# Altium PCB LoraSMS.PcbDoc (part 2 of 2)
Units mil, origin at the board's own origin, x right, y up, seen from the top; angles counter-clockwise.
Board outline 2825 x 4480 mil, 2 copper layers (Top Layer, Bottom Layer), stack 60.8 mil thick; 87 components, 73 nets, 342 pads, 470 vias.
Unrouted connection lines stored in the file: 3.
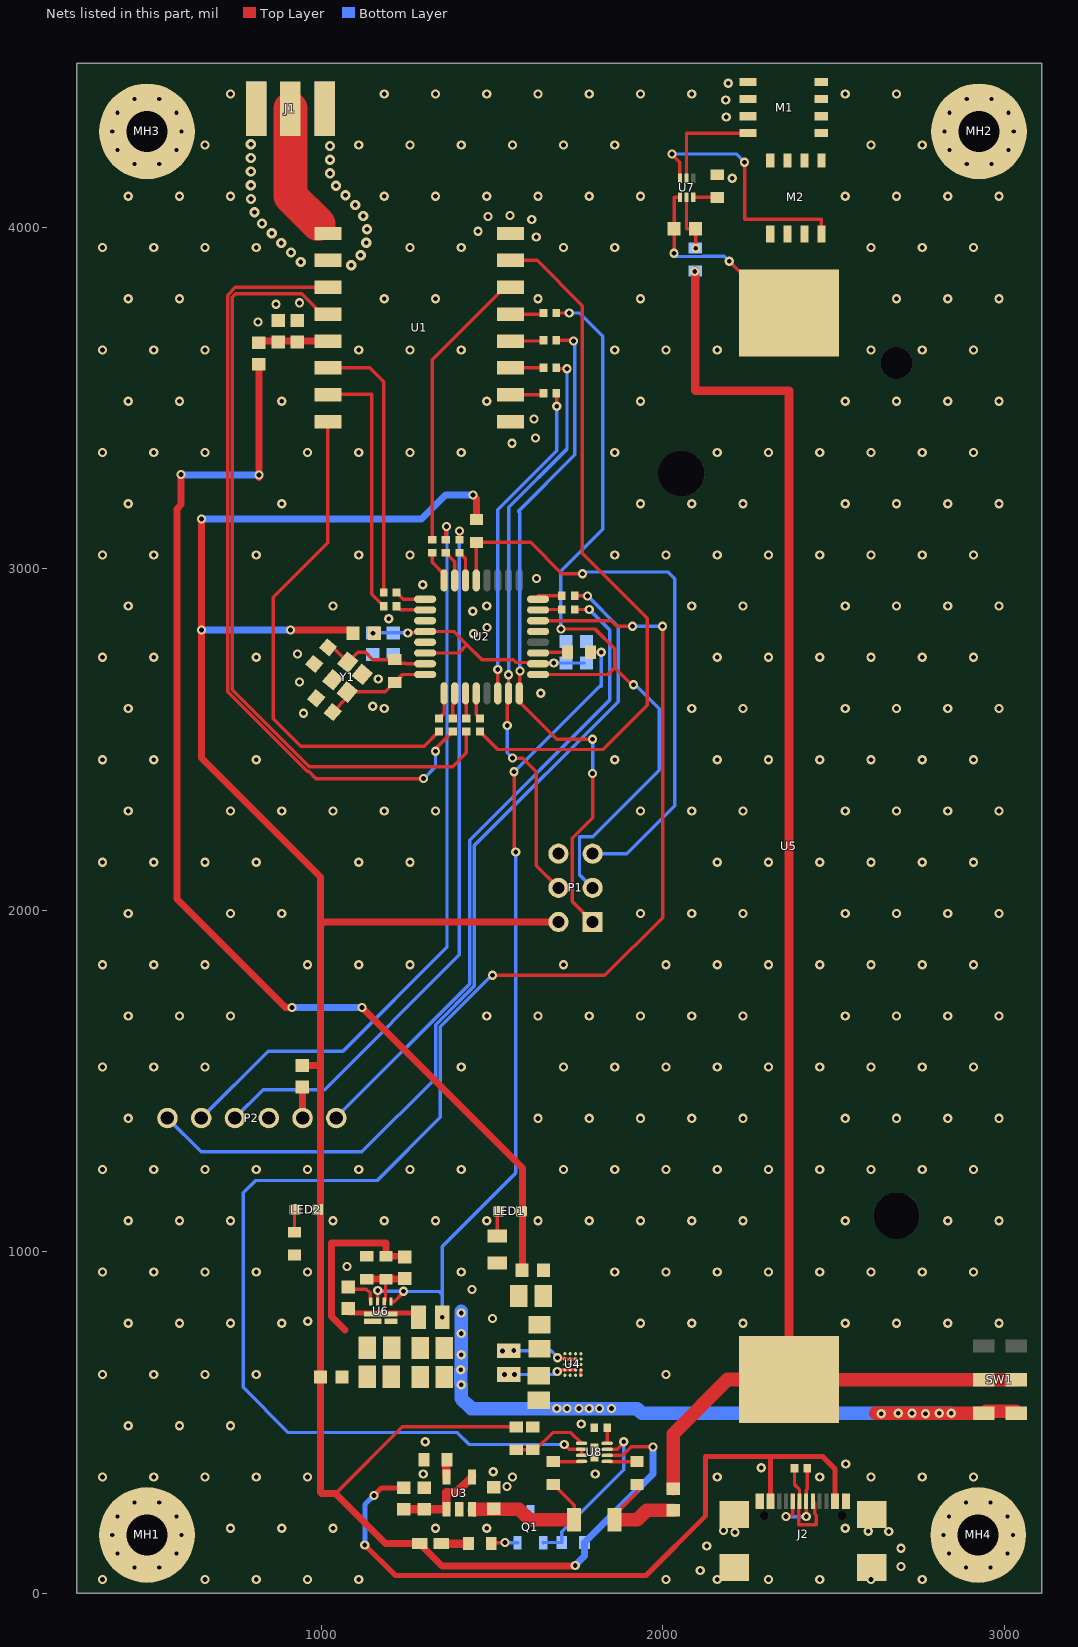
[diagram p2: the nets of this part, all layers, seen from the top]

## Part data
C1 C3 C4 C5: library part 060-00124-000, "CAP, CER, SMT, 25V, +/- 10%, X7R, 0603", DIELECTRIC=X7R, Manufacturer="Kemet Corporation", Manufacturer P/N=C0603C104K3RAC, Package=C0603, TOLERANCE=10%, Value (nF)=100, Value (pF)=100000, Value (µF)=0.1, VOLTAGE=25V, Avidyne P/N=060-00124-000, Cost=0.0043
C2 C3 C8 C9: library part 060-00192-001, "CAP, CER, SMT, 1.0UF, 25V, 10%, X5R, 0603", DIELECTRIC=X5R, Manufacturer="Kemet Corporation", Manufacturer P/N=C0603C105K3PAC, Package=C0603, TOLERANCE=10%, Value (nF)=1000, Value (pF)=1000000, Value (µF)=1, VOLTAGE=25V, Avidyne P/N=060-00192-001, Cost=0.0145
C6 C7: library part 060-00139-005, "CAP, CER, 10%, 50V, 27PF, CAP0603", DIELECTRIC=NP0, Manufacturer="Kemet Corporation", Manufacturer P/N=C0603C270K5GAC, Package=C0603, TOLERANCE=10%, Value (nF)=0.027, Value (pF)=27, Value (µF)=0.000027, VOLTAGE=50V, Avidyne P/N=060-00139-005, Cost=0.01
C10 C11 C17 C18: library part 060-00196-000, "CAP, CER, 10UF, 16V, X5R, 0805", DIELECTRIC=X5R, Manufacturer="Murata Manufacturing Co., Ltd.", Manufacturer P/N=GRM21BR61C106KE15L, Package=C0805, TOLERANCE=10%, Value (nF)=10000, Value (pF)=10000000, Value (µF)=10, VOLTAGE=16V, Avidyne P/N=060-00196-000, Cost=0.0373
C12: library part 060-00269-000, "CAP, CER, 0805, 20%, 6.3V, X5R, 47UF", DIELECTRIC=X5R, Manufacturer="Kemet Corporation", Manufacturer P/N=C0805C476M9PACTU, Package=C0805, TOLERANCE=20%, Value (nF)=47000, Value (pF)=47000000, Value (µF)=47, VOLTAGE=6.3V, Avidyne P/N=060-00269-000, Cost=0.164
C13: library part 060-00243-000, "CAP, CER, 5%, 25V, C0G, 0603, 10,000PF", DIELECTRIC=NP0, Manufacturer="TDK Corporation", Manufacturer P/N=C1608C0G1E103JT, Package=C0603, TOLERANCE=5%, Value (nF)=10, Value (pF)=10000, Value (µF)=0.01, VOLTAGE=25V, Avidyne P/N=060-00243-000, Cost=0.2528
C14 C15: library part 060-00268-000, "CAP, CER, 0805, 20%, 10V, X7R, 22UF", DIELECTRIC=X7R, Manufacturer="Taiyo Yuden USA, Inc.", Manufacturer P/N=LMK212BJ226MG-T, Package=C0805, TOLERANCE=20%, Value (nF)=22000, Value (pF)=22000000, Value (µF)=22, VOLTAGE=10V, Avidyne P/N=060-00268-000, Cost=0.134
C16: library part 064-00028-016, "CAP RF, HIQ, NPO, +/-1%, 10GHZ, 200, 100V, 0603, 10PF, ROHS", DIELECTRIC=NP0, Manufacturer=Vishay, Manufacturer P/N=VJ0603D100FXBA, Package=C0603, TOLERANCE=1%, Value (nF)=0.01, Value (pF)=10, Value (µF)=0.00001, VOLTAGE=100V, Avidyne P/N=064-00028-016, Cost=0.18353
C19: library part 060-00041-000, "CAP, CER, SMT, 25V, +80/-20%,Y5V,0603,.1uf", DIELECTRIC=Y5V, Manufacturer="Kemet Corporation", Manufacturer P/N=C0603C104M3VAC, Package=C0603, TOLERANCE=20%, Value (nF)=100, Value (pF)=100000, Value (µF)=0.1, VOLTAGE=25V, Avidyne P/N=060-00041-000
D1: library part 023-00316-000, "DIODE, LED, RED, SMT, 2.5V, 0603", Current=20mA, LED_COLOR=RED, Manufacturer=Kingbright, Package=D0603, VOLTAGE=2.5V, Avidyne P/N=023-00316-000, Candela=100mcd, Cost=0.04, Manufacturer P/N=APT1608SRCPRV, Type=LED, Vf=1.85V, Wattage=75mW, Wavelength=640nm
FB1 FB2 FB3 FB4 FB5 FB6 FB7: library part 082-00014-004, "FERRITE,100MHZ,0603,25%,120OHM ROHS", Current=2A, Manufacturer=Murata, Package=L0603, Avidyne P/N=082-00014-004, Cost=0.0172, DCR="50 mOhm", Impedance="120 Ohm @ 100MHz", Manufacturer P/N=BLM18PG121SN1D
J1: library part 030-00761-000, "CONN, SMA JACK, FEMALE, EDGE", Manufacturer=LINX, Package=SMA, Avidyne P/N=030-00761-000, Cost=3.37, Manufacturer P/N=CONSMA003.062
J2: library part USB4110-GF-A, "CONN USB 2.0 TYPE-C R/A SMT", Manufacturer=GCT, Avidyne P/N=030-00779-000, Contacts=24, Cost=1.37, Manufacturer P/N=USB4110-GF-A, Type=Female
L1 L2: library part 080-00223-000, "INDUCTOR POWER 1UH 1.5A SMD", Current=3.1A, Current_Sat=3.5A, Manufacturer="Vishay Dale", Manufacturer P/N=IHHP0806AZER1R0M01, Package="0.079\" L x 0.063\" W", TOLERANCE=20%, Avidyne P/N=080-00223-000, Cost=0.13, DCR="65 mOhm"
LED1 LED2: library part LED_SMD_Green_0603_570nm, "LED 0603 SMD Green 570nm 50mcd 20mA", Current - Test=20mA, Manufacturer 1="Kingbright Company LLC", Manufacturer Part Number 1=APT1608CGCK, Package / Case="0603 (1608 metric)", Ratings="20mcd min; 50 mcd typ; 570 nm", Supplier Part Number 1=754-1116-1-ND, Voltage - Forward (Vf) @ 10mA=2.0V, Voltage - Forward (Vf) Typ=2.1V, Color=Green, ComponentLink1Description=http://www.us.kingbright.com/images/catalog/SPEC/APT1608CGCK.pdf, ComponentLink1URL=http://www.us.kingbright.com/images/catalog/SPEC/APT1608CGCK.pdf, Lens Style/Size="Rectangle with Flat Top, 1.1mm x 0.8mm", Lens Type=Clear, Material=AlGaInP, RoHS 1="RoHS Compliant", SCDType=source, Supplier 1=Digi-Key, Viewing Angle=120°, Wavelength - Dominant=570nm, Wavelength - Peak=574nm
M1 M2: library part FDMS7692, "MOSFET N-CH 30V 14A POWER56", Manufacturer="ON Semiconductor", Cost=0.62, Id=14A, Manufacturer P/N=FDMS7692, Qg="22nC @ 10V", Rds(on)="7.5 Ohm", Type=NMOS, Vdss=30V, Vgs(th)="3V @ 250UA", Wattage=2.5w
MH1 MH2 MH3 MH4: library part MHOLE-120-280, "Mounting Hole"
P1: "Header, 3-Pin, Dual row", LatestRevisionDate=17-Jul-2002, LatestRevisionNote="Re-released for DXP Platform.", Publisher="Altium Limited"
P2: "HC-05 BLUETOOTH MODULE"
Q1: library part 025-00001-000, "TRANS,BJT,PNP,3906,SOT-23", Current=200mA, Manufacturer="Fairchild Semiconductor", Package=SOT-23, VOLTAGE=40V, Avidyne P/N=025-00001-000, Cost=0.012, Gain="100 @ 10mA", Manufacturer P/N=MMBT3906, Type=PNP, Wattage=350mW
R1 R24: library part 070-00486-037, "RES, THICK FILM CHIP, SMT, 1/10W, 1%, 0603, 100K OHM", Manufacturer="Panasonic Electronic Devices, Corp.", Manufacturer P/N=ERJ3EKF1003V, Package=R0603, TOLERANCE=1%, Avidyne P/N=070-00486-037, Cost=0.0016, Wattage=1/10W
R2 R3 R5 R6 R7 R8 R9 R10 R11 R12 R13 R14 R15 R16 R17 R27 R32: library part 070-00475-085_SHORT, "RES, THICK FILM CHIP, 1/16W, 1%, RES0402, 0 OHM, ROHS, SHORT-IN-PAD!", Manufacturer="Vishay-Dale Intertechnology, Inc", Manufacturer P/N=CRCW04020000Z0ED, Package=R0402, TOLERANCE=1%, Avidyne P/N=070-00475-085, Cost=0.0012, Do Not Populate=DNP, Wattage=1/16W
R4 R29: library part 070-00470-014, "RES, THICK FILM CHIP, SMT, 1/10W, 5%, 0603, 10K OHM", Manufacturer="Vishay-Dale Intertechnology, Inc", Manufacturer P/N=CRCW060310K0JNEA, Package=R0603, TOLERANCE=5%, Avidyne P/N=070-00470-014, Wattage=1/10W
R18: library part 070-00305-000, "RES, 1/10W, 5%, 0603, I MEG", Manufacturer="KOA-Speer Electronics, Inc.", Manufacturer P/N=RM73B1JT105J, Package=R0603, TOLERANCE=5%, Avidyne P/N=070-00305-000, Wattage=1/10W
R19: library part 070-00072-000, "RES, 1/8W, 5%, 0805, 330 OHM", Manufacturer="KOA-Speer Electronics, Inc.", Manufacturer P/N=RM73B2AT331J, Package=R0805, TOLERANCE=5%, Avidyne P/N=070-00072-000, Cost=0.0019, Wattage=1/8W
R20 R25: library part 070-00470-011, "RES, THICK FILM CHIP, SMT, 1/10W, 5%, 0603, 510 OHM", Manufacturer="Panasonic Electronic Devices, Corp.", Manufacturer P/N=ERJ3GEYJ511V, Package=R0603, TOLERANCE=5%, Avidyne P/N=070-00470-011, Wattage=1/10W
R21: library part 070-00442-000, "RES, 1/16 W, 1%, 0603, 330 OHM", Manufacturer="Panasonic Electronic Devices, Corp.", Manufacturer P/N=ERJ-3ENF3300V, Package=R0603, TOLERANCE=1%, Avidyne P/N=070-00442-000, Wattage=1/10W
R22: library part 070-00486-071, "RES, THICK FILM CHIP, SMT, 1/10W, 1%, 0603, 316K OHM", Manufacturer="Panasonic Electronic Devices, Corp.", Manufacturer P/N=ERJ3EKF3163V, Package=R0603, TOLERANCE=1%, Avidyne P/N=070-00486-071, Cost=0.0016, Wattage=1/10W
R23: library part 070-00208-000, "RES, 1/10W, 5%, 0603, 2.2K OHM", Manufacturer="KOA-Speer Electronics, Inc.", Manufacturer P/N=RM73B1JT222J, Package=R0603, TOLERANCE=5%, Avidyne P/N=070-00208-000, Cost=0.0012, Wattage=1/10W
R26: library part 070-00415-000, "RES, 1/16W, 1%, 0603, 2.00K OHM", Manufacturer="Panasonic Electronic Devices, Corp.", Manufacturer P/N=ERJ-3EKF2001V, Package=R0603, TOLERANCE=1%, Avidyne P/N=070-00415-000, Cost=0.0032, Wattage=1/16W
R28 R31: library part 070-00486-069, "RES, THICK FILM CHIP, SMT, 1/10W, 1%, 0603, 5.1 OHM", Manufacturer="Panasonic Electronic Devices, Corp.", Manufacturer P/N=ERJ-3EKF5R1V, Package=R0603, TOLERANCE=1%, Avidyne P/N=070-00486-069, Wattage=1/10W
R30: library part 070-00499-001, "RES, THICK FILM, CURRENT SENSE, 1/2 W, 1%, RES1206, 0.05 OHMS", Manufacturer="TT Electronics, PLC", Manufacturer P/N=LRC-LR1206LF-01-R050-F, Package=R1206, TOLERANCE=1%, Avidyne P/N=070-00499-001, Cost=0.155, Wattage=1/2W
R33: library part 070-00113-000, "RES,1/10W,1%,0603,100K OHM", Manufacturer="Panasonic Electronic Devices, Corp.", Manufacturer P/N=ERJ-3EKF1003V, Package=R0603, TOLERANCE=1%, Avidyne P/N=070-00113-000, Cost=0.002, Wattage=1/10W
R34: library part 070-00597-000, "RES, METAL FILM, 1/16W, .5%, 0603, SMD, 4.02K", Manufacturer=Susumu, Manufacturer P/N=RR0816P-4021-D-59H, Package=R0603, TOLERANCE=1%, Avidyne P/N=070-00597-000, Cost=0.01178, Wattage=1/16W
SW1: library part JS202011JAQN, "SWITCH SLIDE DPDT 300MA 6V", Manufacturer P/N=C&K, Cost=0.51, Manufacturer=JS202011JAQN
U1: library part "LoRa Module", "RFM69HCW WIRELESS TRANSCEIVER 91", Current=130mA, Manufacturer=SparkFun, Manufacturer P/N=COM-13909, Package=Module, Voltage-Input="1.8V ~ 3.6V", Avidyne P/N=011-XXXXX-XXX, Cost=5.95
U2: "8-bit AVR Microcontroller, 32KB Flash, 1KB EEPROM, 2KB SRAM, 32-pin TQFP, Industrial Grade (-40°C to 85°C)", Supplier Part Number 1=ATMEGA328P-AUR-ND, Code_JEDEC=MS-026-ABA, ComponentLink1Description="Manufacturer Link", ComponentLink1URL=http://www.atmel.com/products/avr/default.asp?, ComponentLink2Description="ATmega48A/48PA/88A/88PA/168A/168PA/328/328P Datasheet", ComponentLink2URL=http://www.atmel.com/dyn/resources/prod_documents/8271.pdf, ComponentLink3Description="ATmega48A/48PA/88A/88PA/168A/168PA/328/328P Summary", ComponentLink3URL=http://www.atmel.com/dyn/resources/prod_documents/8271S.pdf, ComponentLink4Description="Atmel.com Home", ComponentLink4URL=http://www.atmel.com, DatasheetVersion="revA, Jan-2010", PackageDescription="32-Lead, 7x7x1.0 mm Body, 0.8mm Lead Pitch, Thin Profile Plastic Quad Flat Package (TQFP)", PackageReference=32A, PackageVersion="revB, Oct-2001", Published=1-Apr-2010, Publisher="Altium Limited", Supplier 1=Digi-Key, Supplier 2=Mouser, Supplier Part Number 2=556-ATMEGA328P-AUR
U3: "IC LI-ION/LI-POLY CTRLR SOT23-5", Current=500mA, Manufacturer="Microchip Technology", Manufacturer P/N=MCP73812T-420I/OT, Package="SC-74A, SOT-753", Voltage-Input="3.75V ~ 6V", Avidyne P/N=011-XXXXX-XXX, Cost=0.56
U4: Manufacturer Name="Texas Instruments", Manufacturer Part Number=TPS630242YFFR, PackageReference=TPS630242YFFR
U5: library part 1042, "HOLDER BATTERY 1CELL 18650 SMD", Manufacturer="Keystone Electronics", Cost=2.47, Manufacturer P/N=1042
U6: library part TPS61230ARNSR, "TPS61230ARNSR", Manufacturer Name="Texas Instruments", Manufacturer Part Number=TPS61230ARNSR, PackageReference=TPS61230ARNSR
U7: "IC LITHIUM BATT PROTECT 6-SON", Manufacturer="Texas instruments", Cost=0.69, Manufacturer P/N=BQ29702DSER
U8: library part INA381A3IDSGR, "LOW COST CURRENT SENSOR WITH COM", Manufacturer=TI, Package="8-WFDFN Exposed Pad", Voltage-Input="0V ~ 6V", Avidyne P/N=011-XXXXX-XXX, Cost=.75, Manufacturer P/N=INA381A3IDSGR
Y1: library part FA-20H, "CRYSTAL 16.0000MHZ 8PF SMD", Frequency Stability="10 ppm", Manufacture=EPSON, Manufacture PN="FA-20H 16.0000MF10Z-AJ0", Package="0.098\" L x 0.079\" W (2.50mm x 2.00mm)", VOLTAGE="2.7V - 3.6V", Cost=0.69, Frequency="16 MHz"

## Via types
v1: diameter 27, hole 14, Top Layer to Bottom Layer, 448 vias
v2: diameter 30, hole 14, Top Layer to Bottom Layer, 22 vias

## Nets (pads, with @x,y where several pads share a name; then routed paths per layer and width w, separated by ;. In a path a pad name is that pad's centre, name@x,y a point inside that pad or via, vN(x,y) a via of type N, cw(c..) or ccw(c..) an arc to the next point about the centre after c; other vN are vias at no path point)
3.3V: FB2.2 FB6.2 LED1.A | length 3446.1
  Top Layer w20: v1(590,3275) 590,3187.53 577.5,3175.03 577.5,2032.5 895,1715 v1(915,1715) ; v1@817.72,3266.93 v1(817.72,3273.94) FB2.2@817.72,3598.5 ; v1(1120,1715) 1590,1245 FB6.2@1590,945
  Bottom Layer w20: v1(590,3275) 591.06,3273.94 v1(817.72,3273.94) ; v1(915,1715) v1(1120,1715)
5V: D1.A FB1.1 FB3.1 FB7.2 LED2.A P1.2 R4.1 R29.1 R33.1 U8.2 | length 7121.2
  Top Layer w10: 998.01,1544.5 998.5,1544 ; 1042.5,291.5 1237.47,486.46 R33.1@1571,486.46 ; U8.2@1837.4,403.14 1883.14,403.14 1908,428 v1(1972,428)
  Top Layer w20: v1(650,3145) v1(650,2820) 650,2445 998.5,2096.5 998.5,1955 ; v1(910,2820) 1083.5,2820 FB1.1@1093.5,2810 ; FB3.1@945,1544.5 998.01,1544.5 ; v1(1445,3215) 1455,3205 R4.1@1455,3150 ; P1.2@1695,1965 1008.5,1965 998.5,1955 ; v1(1744,81) 1742,79 1354.5,79 D1.A@1288.5,145 1189,145 1042.5,291.5 1001.5,291.5 998.5,294.5 FB7.2@998.5,632.68 998.5,1544 998.5,1955
  Bottom Layer w20: v1(650,2820) v1(910,2820) ; v1(650,3145) 1294.21,3145 1364.21,3215 v1(1445,3215) ; v1(1744,81) 1771.46,108.46 R29.1@1771.46,148 1972,348.54 v1(1972,428)
BT_EN: P2.1 R2.1 | length 1887.6
  Top Layer w10: R2.1@1742.8,2880 v1(1785,2880)
  Bottom Layer w10: P2.1@1044.49,1391 1044.49,1392.91 1435,1783.42 1435,2205 1845,2615 1845,2820 v1(1785,2880)
BT_RX: P2.5 R10.1 | length 2199.1
  Top Layer w10: R10.1@1365,3083.9 v1@1365,3122.76
  Bottom Layer w10: P2.5@648.82,1391 844.82,1587 1064,1587 1368.46,1891.46 1368.46,1932.46 1368.46,3109.02 v1@1368.46,3124.76
  other v1: 1367,3122.76
BT_STATE: P2.6 R3.1 | length 2623.6
  Top Layer w10: R3.1@1742.8,2920 v1(1780,2920)
  Bottom Layer w10: P2.6@550,1391 649,1292 1119,1292 1335.06,1508.06 1335.06,1663.77 1448.94,1777.65 1448.94,2188.94 1870,2610 1870,2830 v1(1780,2920)
BT_TX: P2.4 R9.1 | length 2122.5
  Top Layer w10: R9.1@1405,3083.9 v1(1405,3110)
  Bottom Layer w10: P2.4@747.64,1391 830.64,1474 1010,1474 1405,1869 v1(1405,3110)
BT_VCC: FB3.2 P2.2 | length 90.8
  Top Layer w10: P2.2@945,1391.67 P2.2@945.67,1391
  Top Layer w20: P2.2@945,1391.67 FB3.2@945,1481.5
Charge_Sense: U2.22 U8.6 U8.7 | length 4594.8
  Top Layer w10: v1(1502,1809) 1831,1809 2000,1978 v1(2000,2831) ; U2.22@1635.35,2847.24 1849.76,2847.24 1866,2831 v1(1912,2831) ; v1(1712,435) 1726.14,420.86 U8.6@1762.6,420.86 U8.7@1762.6,403.14
  Bottom Layer w10: v1(1502,1809) 1500,1807 1498,1807 1349,1658 1349,1393 1164,1208 808,1208 772,1172 772,602 904,470 1399,470 1434,435 v1(1712,435) ; v1(1912,2831) v1(2000,2831)
DSP_CS: R5.1 U2.14 | length 950.7
  Top Layer w10: v1(1517,2704) 1517,2634.89 U2.14@1517.24,2634.65 ; R5.1@1688.9,3513.19 1690,3512.13 v1(1690,3475)
  Bottom Layer w10: v1(1517,2704) 1517,3172 1690,3345 v1(1690,3475)
DSP_MISO: P1.1 R7.1 U2.16 | length 2026.3
  Top Layer w10: v1(1582,2700) 1582,2640.88 1578,2636.88 U2.16@1580.24,2634.65 1580.24,2609.76 1690,2500 v1(1795,2500) ; R7.1@1688.9,3668.19 1736.81,3668.19 v1(1738.94,3666.06) ; P1.1@1795,1965 1735,2025 1735,2210 1795,2270 v1(1795,2400)
  Bottom Layer w10: v1(1582,2700) 1582,3164 1578,3168 1742.94,3332.94 1742.94,3662.06 v1(1738.94,3666.06) ; v1(1795,2400) v1(1795,2500)
DSP_MOSI: P1.4 R6.1 U2.15 | length 1712
  Top Layer w10: v1(1545,2540) 1545,2630.91 U2.15@1548.74,2634.65 v1@1548.74,2696.58 ; v1(1560,2445) 1590,2445 1630,2405 1630,2130 P1.4@1695,2065 ; R6.1@1688.9,3588.19 1692.13,3585 v1(1720,3585)
  Bottom Layer w10: v1(1545,2540) 1545,2460 v1(1560,2445) ; v1(1549,2689) 1549,3179 1720,3350 v1(1720,3585)
DSP_RESET: P1.5 R4.2 U2.29 | length 1702.8
  Top Layer w10: U2.29@1454.25,2965.35 1454.25,3075.79 R4.2@1455,3076.54 1613.46,3076.54 1705,2985 v1(1765,2985)
  Bottom Layer w10: v1(1765,2985) 1770,2990 2015,2990 2035,2970 2035,2305 1895,2165 P1.5@1795,2165
DSP_SCK: P1.3 R8.1 U2.17 | length 2383.9
  Top Layer w10: U2.17@1635.35,2689.76 1839.76,2689.76 1860,2710 ; R8.1@1688.9,3748.19 v1(1726.81,3748.19) ; v1(1702,2823) 1802,2823 1860,2765 1860,2710 ; v1(1915,2660) 1910,2660 1860,2710
  Bottom Layer w10: v1(1702,2823) 1702,2988 1700,2990 1825,3115 1825,3680 1756.81,3748.19 v1(1726.81,3748.19) ; P1.3@1795,2065 1756.54,2103.46 1756.54,2215 1795,2215 1990,2410 1990,2590 1920,2660 v1(1915,2660)
GND: C1.2 C2.2 C3.2 C4.2 C5.2 C6.1 C7.1 C8.2 C9.2 C10.2 C11.2 C12.2 C14.2 C15.2 C17.2 C18.2 J1.2 J2.A1 J2.A12 J2.H1 J2.H2 J2.H3 J2.H4 M1.1 M1.2 M1.3 MH1.1 MH2.1 MH3.1 MH4.1 P1.6 P2.3 Q1.3 R19.2 R23.2 R24.2 R25.2 R26.2 R32.1 R34.2 U1.1 U1.8 U1.10 U2.3 U2.5 U2.21 U3.2 U4.8 U4.9 U4.10 U4.11 U4.12 U6.6 U8.9 Y1.2 Y1.4
  other v1: 360,40 660,40 810,40 960,40 1110,40 2010,40 2160,40 2310,40 2460,40 2610,40 2760,40 2110,66 2698,78 2698,131 2129,138 2212,178 2662,180 2602,181 2178,183 735,190 885,190 1035,190 1335,190 1485,190 2535,190 1544,312 360,340 510,340 660,340 810,340 960,340 1560,340 2160,340 2460,340 2610,340 2760,340 2910,340 1299,349 1803,349 1504,355 2289,367 2536,378 1305,443 435,490 585,490 735,490 1762,495 360,640 510,640 660,640 810,640 2010,640 435,790 585,790 735,790 885,790 1935,790 2085,790 2235,790 2535,790 2685,790 2835,790 2985,790 961,796 1502,804 1442,889 360,940 510,940 660,940 810,940 960,940 1410,940 1860,940 2010,940 2160,940 2310,940 2460,940 2610,940 2760,940 2910,940 1076,956 435,1090 585,1090 735,1090 1035,1090 1185,1090 1335,1090 1485,1090 1635,1090 1785,1090 1935,1090 2085,1090 2235,1090 2535,1090 2835,1090 2985,1090 360,1240 510,1240 660,1240 810,1240 960,1240 1110,1240 1260,1240 1410,1240 1710,1240 1860,1240 2010,1240 2160,1240 2310,1240 2460,1240 2610,1240 2760,1240 2910,1240 435,1390 1635,1390 1785,1390 1935,1390 2085,1390 2235,1390 2535,1390 2685,1390 2835,1390 2985,1390 360,1540 510,1540 660,1540 1410,1540 1710,1540 1860,1540 2010,1540 2160,1540 2310,1540 2460,1540 2610,1540 2760,1540 2910,1540 435,1690 585,1690 735,1690 1485,1690 1635,1690 1785,1690 1935,1690 2085,1690 2235,1690 2535,1690 2685,1690 2835,1690 2985,1690 360,1840 510,1840 660,1840 960,1840 1110,1840 1260,1840 1710,1840 2010,1840 2160,1840 2310,1840 2460,1840 2610,1840 2760,1840 2910,1840 435,1990 735,1990 885,1990 1935,1990 2085,1990 2235,1990 2535,1990 2685,1990 2835,1990 2985,1990 360,2140 510,2140 660,2140 810,2140 1110,2140 1260,2140 2160,2140 2310,2140 2460,2140 2610,2140 2760,2140 2910,2140 435,2290 735,2290 885,2290 1035,2290 1185,2290 1335,2290 1935,2290 2085,2290 2235,2290 2535,2290 2685,2290 2835,2290 2985,2290 360,2440 510,2440 810,2440 1860,2440 2160,2440 2310,2440 2460,2440 2610,2440 2760,2440 2910,2440 948,2576 435,2590 1185,2590 2085,2590 2235,2590 2535,2590 2685,2590 2835,2590 2985,2590 1151,2597 1643,2635 937,2668 1167,2676.63 360,2740 510,2740 810,2740 2160,2740 2310,2740 2460,2740 2610,2740 2760,2740 2910,2740 931,2750 1446,2809 1486,2827 1198,2853 1444,2875 435,2890 1035,2890 1485,2890 2085,2890 2235,2890 2535,2890 2685,2890 2835,2890 2985,2890 1297.6,2952.54 1631,2971 360,3040 510,3040 810,3040 1110,3040 1260,3040 1860,3040 2010,3040 2160,3040 2310,3040 2460,3040 2610,3040 2760,3040 2910,3040 435,3190 885,3190 1935,3190 2085,3190 2235,3190 2535,3190 2685,3190 2835,3190 2985,3190 360,3340 510,3340 660,3340 960,3340 1110,3340 1260,3340 1410,3340 1860,3340 2160,3340 2310,3340 2460,3340 2610,3340 2760,3340 2910,3340 1559,3367 1628,3382 1623,3438 435,3490 585,3490 885,3490 1485,3490 1935,3490 2535,3490 2685,3490 2835,3490 2985,3490 360,3640 510,3640 660,3640 1110,3640 1260,3640 1410,3640 1860,3640 2010,3640 2160,3640 2610,3640 2760,3640 2910,3640 815,3722 868,3774 937,3778 435,3790 585,3790 1185,3790 1335,3790 1635,3790 1935,3790 2685,3790 2835,3790 2985,3790 360,3940 510,3940 660,3940 810,3940 1260,3940 1410,3940 1710,3940 1860,3940 2610,3940 2760,3940 2910,3940 1630,3971 1459,3988 1617,4022 1489,4031 1553,4034 435,4090 585,4090 735,4090 1185,4090 1335,4090 1485,4090 1635,4090 1785,4090 1935,4090 2535,4090 2685,4090 2835,4090 2985,4090 2204,4143 660,4240 1110,4240 1260,4240 1410,4240 1560,4240 1710,4240 1860,4240 2610,4240 2760,4240 2186,4322 2185,4372 735,4390 1185,4390 1335,4390 1485,4390 1635,4390 1785,4390 1935,4390 2085,4390 2535,4390 2685,4390 2192,4421
  other v2: 1088.02,3888.36 940.22,3897.28 1115.7,3917.24 911.72,3925.34 883.43,3953.63 1131.87,3953.83 855.15,3981.91 1134.22,3993.76 826.99,4010.32 1123.16,4032.19 804.73,4043.56 1099.78,4064.66 794.81,4082.31 1071.5,4092.94 1043.21,4121.22 794.25,4122.3 1025.75,4157.21 794.25,4162.3 1025.75,4197.21 794.25,4202.3 1025.75,4237.21 794.25,4242.3
LORA_DIO0: R12.1 U1.14 | length 797.2
  Top Layer w10: U1.14@1019.57,3587.48 1142.52,3587.48 1182.91,3547.09 R12.1@1182.91,2930
LORA_DIO1: R13.1 U1.15 | length 764.2
  Top Layer w10: U1.15@1019.57,3508.74 1021.42,3510.59 1147.99,3510.59 1147.99,2924.92 R13.1@1182.91,2890
LORA_DIO2: R14.1 U1.16 | length 1472
  Top Layer w10: U1.16@1019.57,3430 1019.57,3075.08 860,2915.51 860,2560 940,2480 1302.13,2480 R14.1@1345,2522.91
LORA_DIO3: R15.1 U1.11 | length 2316.9
  Top Layer w10: U1.11@1019.57,3823.7 748.99,3823.7 726.06,3800.77 726.06,2639.23 959.23,2406.06 963.94,2406.06 985,2385 v1(1300,2385) ; v1(1335,2465) 1335,2472.87 R15.1@1385,2522.91
  Bottom Layer w10: v1(1300,2385) 1335,2420 v1(1335,2465)
LORA_DIO4: R16.1 U1.12 | length 2316.2
  Top Layer w10: U1.12@1019.57,3744.96 1003.04,3744.96 943,3805 750,3805 740,3795 740,2645 965,2420 1385,2420 1425,2460 R16.1@1425,2522.91
LORA_DIO5: R17.1 U1.7 | length 2079.3
  Top Layer w10: R17.1@1465,2522.91 1517.87,2470 1825,2470 1955,2600 1955,2855 1765,3045 1765,3770 1632.56,3902.44 U1.7@1555,3902.44
LORA_RESET: R11.1 U1.6 | length 845.2
  Top Layer w10: R11.1@1325,3083.9 1325,3611 1537.7,3823.7 U1.6@1555,3823.7
NetC1_1: C1.1 C2.1 FB2.1 U1.13 | length 205.7
  Top Layer w20: FB2.1@815,3663.5 817.72,3666.22 U1.13@1019.57,3666.22
NetC3_1: C3.1 C4.1 C5.1 FB1.2 U2.4 U2.6 U2.18 | length 792.5
  Top Layer w10: v1(1253.5,2811.5) 1300.39,2811.5 U2.4@1304.65,2815.75 1388.25,2815.75 1427,2777 ; U2.6@1304.65,2752.76 1402.76,2752.76 1427,2777 ; v1(1681.5,2723.5) 1637.6,2723.5 U2.18@1635.35,2721.26 1631.61,2725 1570.14,2725 1562.14,2733 1471,2733 1427,2777
  Bottom Layer w10: v1(1152.25,2810.25) 1153.5,2811.5 C3.1@1211,2811.5 v1(1253.5,2811.5) ; v1(1681.5,2723.5) C5.1@1717,2723.5 C3.1@1770,2723.5
NetC6_2: C6.2 R18.1 U2.7 Y1.1 | length 342.6
  Top Layer w10: C6.2@1020.25,2769.13 1034.08,2769.13 Y1.1@1077.78,2725.43 ; Y1.1@1063.94,2725.43 Y1.1@1077.78,2725.43 ; U2.7@1304.65,2721.26 1246.97,2721.26 1245.23,2723 1225.46,2723 R18.1@1215,2733.46 1151.54,2733.46 1130,2755 1107.35,2755 Y1.1@1077.78,2725.43
NetC7_2: C7.2 R18.2 U2.8 Y1.3 | length 325.5
  Top Layer w10: C7.2@1034.13,2579.75 1076.98,2622.61 Y1.3@1076.98,2638.73 1187.19,2638.73 R18.2@1215,2666.54 1238.23,2689.76 U2.8@1304.65,2689.76
NetC8_1: C8.1 FB4.1 U3.1 U3.4 | length 268.3
  Top Layer w25: FB4.1@1241.77,245.12 1242.28,245.63 U3.1@1366.97,245.63 1366.97,295 1396.65,295 U3.4@1441.77,340.12
NetC9_1: C9.1 R30.2 R31.1 U3.3 | length 457.3
  Top Layer w10: 1674.02,215 1680,220.98 1680,215.98 ; R31.1@1680,318.07 1740.94,257.13 R30.2@1740.94,215
  Top Layer w25: U3.3@1443.27,247.13 U3.3@1448,242.39
  Top Layer w40: U3.3@1448,242.39 1448,245.63 1579.37,245.63 1610,215 1674.02,215 R30.2@1740.94,215
NetC11_1: C11.1 C12.1 FB6.1 U4.1 U4.2 U4.3 U4.4
NetC13_1: C13.1 U6.1 | length 94.7
  Top Layer w10: C13.1@1080,890 1132.39,890 1143.56,878.82 1143.56,855.02 U6.1@1145.47,853.11
NetC13_2: C13.2 L2.2 U6.5 | length 217.5
  Top Layer w10: L2.2@1285.16,807.68 L2.2@1285.16,820
  Top Layer w15: C13.2@1080,820 L2.2@1285.16,820
NetC14_1: C14.1 C15.1 C16.1 FB7.1 R22.1 U6.7 | length 527.4
  Top Layer w20: 1070,770 1030,810 1030,1025 1190,1025 R22.1@1190,986.14 1245,986.14 C16.1@1245,984.17
NetC16_2: C16.2 R22.2 R24.1 U6.3 | length 238.5
  Top Layer w10: U6.3@1184.84,853.11 1188.44,856.7 1188.44,915.62 1184.84,919.21 R22.2@1190,919.21
  Top Layer w20: C16.2@1245,921.18 1243.03,919.21 R22.2@1184.84,919.21 ; R22.2@1184.84,919.21 R24.1@1133.19,919.21 R22.2@1184.84,919.21
NetC19_1: C19.1 R21.2 U7.5 | length 176.2
  Top Layer w10: U7.5@2070,4086.65 2070,3995 C19.1@2096.5,3995 2096.5,3938.46 v1@2095,3938.46
  other v1: 2097,3938
NetC19_2: C19.2 M2.1 M2.2 M2.3 U5.2 U7.4 | length 589.1
  Top Layer w10: v1(2033.5,3923.5) C19.2@2033.5,3995 2033.5,4086.65 U7.4@2050.31,4086.65 ; v1(2195,3900) 2346.3,3748.7 U5.2@2370.04,3748.7
  Bottom Layer w10: v1(2033.5,3923.5) 2043.23,3913.78 2118.39,3913.78 2118.61,3914 2181,3914 v1(2195,3900)
NetD1_C: D1.C R20.1 | length 80
  Top Layer w25: D1.C@1351.5,145 R20.1@1431.54,145
NetFB5_1: FB5.1 R28.1 R30.1 | length 320
  Top Layer w10: R30.1@1859.06,215 1859.06,229.06 1925,295 R28.1@1925,318.07 R28.1@1925,323.07 ; 1925,215.98 1925.98,215
  Top Layer w40: R30.1@1859.06,215 1925.98,215 1953.11,242.13 FB5.1@2031.02,242.13
NetJ1_1: J1.1 U1.9 | length 370.7
  Top Layer w100: J1.1@910,4346.42 910,4090.75 991.37,4009.37
NetJ2_A6: J2.A6 J2.B6 R27.2 | length 295.9
  Top Layer w10: R27.2@2386.1,365 2386.1,317.9 2400.68,303.31 J2.A6@2400.68,269.32 2398.44,267.07 2398.44,200.56 2450,200.56 2450,227 2444.9,232.1 2444.9,264.48 J2.B6@2440.06,269.32
NetJ2_A7: J2.A7 J2.B7 R27.1 | length 268
  Top Layer w10: v1(2361,224) 2374,224 2381,231 J2.B7@2381,269.32 ; v1(2420.87,224.29) 2420.87,225.13 2418,228 2420.37,230.37 J2.A7@2420.37,269.32 2420.37,301.37 2423.9,304.9 R27.1@2423.9,365
  Bottom Layer w10: v1(2361,224) 2414,224 2417,227 2420,224 2420.29,224.29 v1(2420.87,224.29)
NetL1_1: L1.1 U4.13 U4.14 U4.15 | length 221.9
  Top Layer w10: v1(1691.68,649.11) 1691.97,649.11 1693.79,647.29 1700,653.5 U4.13@1713.5,653.5 U4.15@1745,653.5
  Bottom Layer w10: v1(1537,640) 1537,638.16 1535.16,640 v1(1566,640) 1683.5,640 1691.68,648.17 v1(1691.68,649.11)
NetL1_2: L1.2 U4.5 U4.6 U4.7 | length 222.8
  Top Layer w10: v1(1692,689) 1693.72,687.28 1711.22,687.28 U4.5@1713.5,685 U4.7@1745,685
  Bottom Layer w10: v1@1535,709.84 1535.16,710 1535.32,709.84 v1(1564,709.84) 1673.35,709.84 1673.5,710 1693,690.5 1692,689.5 v1(1692,689)
  other v1: 1531,709
NetLED1_K: LED1.K R19.1 | length 76.2
  Top Layer w10: R19.1@1516,1045.37 1516,1118 LED1.K@1519.54,1118
NetLED2_K: LED2.K R25.1 | length 63.1
  Top Layer w10: R25.1@922,1056.46 922,1118 LED2.K@923.54,1118
NetM1_4: M1.4 U7.2 | length 311.5
  Top Layer w10: U7.2@2070,4143.35 2070,4275.2 M1.4@2249.68,4275.2
NetM1_D: M1.D M2.D
NetM2_4: M2.4 U7.3 | length 738.1
  Top Layer w10: v1(2027.16,4214) 2027.16,4213 2050.16,4190 U7.3@2050.16,4143.35 ; v1(2240,4190) 2240,4023.06 2464.8,4023.06 M2.4@2464.8,3979.68
  Bottom Layer w10: v1(2027.16,4214) 2216,4214 v1(2240,4190)
NetQ1_1: Q1.1 R29.2 U8.3 | length 483.9
  Top Layer w10: U8.3@1837.4,420.86 1866.86,420.86 1886,440 v1(1886,443)
  Bottom Layer w10: Q1.1@1650.4,147.72 1650.68,148 R29.2@1704.54,148 1704.54,179.54 1886,361 v1(1886,443)
NetQ1_2: Q1.2 R20.2 | length 78.3
  Top Layer w10: R20.2@1498.46,145 1501.19,147.72 v1(1538.72,147.72)
  Bottom Layer w10: v1(1538.72,147.72) Q1.2@1575.6,147.72
NetR1_2: R1.2 U2.19 | length 88.7
  Top Layer w10: U2.19@1635.35,2752.76 1635.35,2755 R1.2@1721.81,2755
NetR2_2: R2.2 U2.23 | length 70.9
  Top Layer w10: U2.23@1635.35,2878.74 1635.35,2880 R2.2@1705,2880
NetR3_2: R3.2 U2.24 | length 79.4
  Top Layer w10: U2.24@1635.35,2910.24 1635.35,2920 R3.2@1705,2920
NetR5_2: R5.2 U1.2 | length 97.9
  Top Layer w10: U1.2@1555,3508.74 1646.62,3508.74 R5.2@1651.1,3513.19
NetR6_2: R6.2 U1.3 | length 96.4
  Top Layer w10: U1.3@1555,3587.48 1650.35,3587.48 R6.2@1651.1,3588.19
NetR7_2: R7.2 U1.4 | length 96.9
  Top Layer w10: U1.4@1555,3666.22 1649.09,3666.22 R7.2@1651.1,3668.19
NetR8_2: R8.2 U1.5 | length 97.4
  Top Layer w10: U1.5@1555,3744.96 1647.83,3744.96 R8.2@1651.1,3748.19
NetR9_2: R9.2 U2.30 | length 88.1
  Top Layer w10: R9.2@1405,3046.1 1422.76,3028.31 U2.30@1422.76,2965.35
NetR10_2: R10.2 U2.31 | length 91.6
  Top Layer w10: R10.2@1365,3046.1 1391.26,3019.8 U2.31@1391.26,2965.35
NetR11_2: R11.2 U2.32 | length 95.1
  Top Layer w10: R11.2@1325,3046.1 1325,3018.62 1359.76,2983.86 U2.32@1359.76,2965.35
NetR12_2: R12.2 U2.1 | length 92.1
  Top Layer w10: R12.2@1220.71,2930 1240.51,2910.24 U2.1@1304.65,2910.24
NetR13_2: R13.2 U2.2 | length 88.6
  Top Layer w10: R13.2@1220.71,2890 1232.01,2878.74 U2.2@1304.65,2878.74
NetR14_2: R14.2 U2.9 | length 80
  Top Layer w10: R14.2@1345,2560.71 1359.76,2575.51 U2.9@1359.76,2634.65
NetR15_2: R15.2 U2.10 | length 76.5
  Top Layer w10: R15.2@1385,2560.71 1385,2628.39 U2.10@1391.26,2634.65
NetR16_2: R16.2 U2.11 | length 74.9
  Top Layer w10: U2.11@1422.76,2634.65 1425,2632.4 R16.2@1425,2560.71
NetR17_2: R17.2 U2.12 | length 78.3
  Top Layer w10: U2.12@1454.25,2634.65 1454.25,2571.5 R17.2@1465,2560.71
NetR23_1: R23.1 U7.6 | length 74.4
  Top Layer w10: U7.6@2089.69,4086.65 2150.12,4086.65 R23.1@2160,4096.54
NetR26_1: R26.1 U3.5 | length 50.5
  Top Layer w15: R26.1@1366.97,388.5 R26.1@1368.46,390
  Top Layer w25: U3.5@1366.97,340.12 R26.1@1366.97,388.5
NetR28_2: R28.2 U8.1 | length 81
  Top Layer w10: U8.1@1843.98,385 R28.2@1925,385
NetR31_2: R31.2 U8.8 | length 86
  Top Layer w10: R31.2@1680,385 U8.8@1766.02,385
NetR32_2: R32.2 U8.4 | length 45.4
  Top Layer w10: U8.4@1837.4,438.57 U8.4@1837.4,438.57 R32.2@1837.4,484
NetR33_2: R33.2 R34.1 U8.5 | length 225.5
  Top Layer w10: R33.2@1571,419.54 1627.54,419.54 1678,470 1731.17,470 U8.5@1762.6,438.57
VBAT: C10.1 C17.1 C18.1 L2.1 R1.1 SW1.1 U4.16 U4.17 U4.18 U4.19 U4.20 U6.2 U6.4 | length 4612.9
  Top Layer w10: U6.2@1165.16,853.11 1166,853.95 v1(1166,886) ; U6.4@1204.53,853.11 1214.11,853.11 1241,880 v1(1241,884) ; v1(1565,2405) 1565,2175 v1(1570,2170) ; U4.20@1760.75,637.76 U4.16@1760.75,653.5 ; R1.1@1788.74,2755 v1(1820,2755)
  Top Layer w40: 2625,526.57 v1(2690,526.57) v1(2730,526.57) v1(2810,526.57) v1(2845,526.57) SW1.1@2940.51,526.57 2946.73,532.8 3035,532.8 SW1.1@3035,526.57
  Bottom Layer w10: v1@1158.02,883 v1@1166,883 ; v1(1166,886) v1@1166,883 ; v1(1354.84,807.68) 1354.84,874.17 ; v1(1565,2405) 1820,2660 ; v1(1570,2170) 1570,1230 1354.84,1014.84 1354.84,874.17 ; 1820,2655 1820,2660 ; v1(1820,2755) 1820,2660 ; v1@1166,883 1167,884 v1(1241,884) 1242,883 1346.02,883 1354.84,874.17
  Bottom Layer w40: v1@1410,825 v1(1410,820) v1(1410,760) v1(1410,697.5) 1410,655 v1(1409,654) 1409,611 v1(1410,610) 1410,570 1440,540 v1(1690,540) v1(1720,540) v1(1755,540) v1(1785,540) v1(1815,540) v1(1850,540) 1925,540 1938.43,526.57 v1(2690,526.57) v1(2730,526.57) v1(2810,526.57) v1(2845,526.57)
  other v1: 2640,525 2770,525
VBATs: FB5.2 R21.1 SW1.2 U5.1 | length 4752.3
  Top Layer w25: v1@2095,3871.54 2095,3520 2370.04,3520 U5.1@2370.04,625.08
  Top Layer w40: FB5.2@2031.02,305.12 2031.02,466.02 2190.08,625.08 U5.1@2370.04,625.08 2370.12,625 SW1.2@2940.51,625 SW1.2@3035,625
  other v1: 2094,3870
VUSB: FB4.2 J2.A4 J2.A9 | length 2152.6
  Top Layer w15: v1(1128,141) 1218,51 1951,51 2126,226 2126,400 2316,400 ; v1(1155,286) 1177.11,308.11 FB4.2@1241.77,308.11 ; J2.A4@2315.94,269.32 2315.94,399.94 2316,400 ; J2.A9@2505,269.32 2505,363 2468,400 2316,400
  Bottom Layer w15: v1(1128,141) 1128,259 v1(1155,286)
pads on no net: J2.0 J2.A5 J2.A8 J2.B5 J2.B8 LED1.0 LED2.0 SW1.3 U2.13 U2.20 U2.25 U2.26 U2.27 U2.28 U5.0 U7.1

## Polygon pours and split planes (outlines as drawn)
GND on Top Layer "Top Layer-No Net" (solid, pour order 18): 282,4486 282,0 3110,0 3110,4480
GND on Top Layer "Top Layer-No Net 1" (solid, pour order 26): 160 vertices, not listed, extent 778.98,3850.33 1150.41,4506.93
NetC11_1 on Top Layer "Top Layer-No Net 2" (solid, pour order 10): 1620,970 1620,750 1695,750 1695,695 1825,695 1825,970
VBAT on Top Layer "Top Layer-No Net 3" (solid, pour order 8): 1605,600 1605,520 1865,520 1865,645 1695,645 1695,600
NetM1_D on Top Layer "Top Layer-No Net 4" (solid, pour order 16): 2307,4427 2485,4427 2485,4037 2307,4037
NetC19_2 on Top Layer "Top Layer-No Net 5" (solid, pour order 12): 2301,4005 2301,3830 2495,3830 2495,4005
no net on Top Layer "Top Layer-No Net 6" (solid, pour order 6): 1695,645
no net on Top Layer "Top Layer-No Net 7" (solid, pour order 4): 1795,645
NetC14_1 on Top Layer "Top Layer-No Net 8" (solid, pour order 2): 1165,805 1165,595 1035,595 1035,805
VBAT on Top Layer "Top Layer-No Net 9" (solid, pour order 0): 1330,845 1330,590 1435,590 1435,845
GND on Bottom Layer "Bottom Layer-No Net" (solid, pour order 20): 288,4483 288,-3 3108,-3 3108,4477

## Other copper
Top Layer:
  pour cut-out: 952.92,4474.86 965.04,4469.84 975.44,4461.86 983.42,4451.45 988.44,4439.34 990.15,4426.34 990.15,4406.61 993.52,4402.21 996.3,4397.41 1000.08,4390.86 1000.08,4390.85 1005.12,4378.69 1008.51,4366.03 1010.23,4352.97 1010.23,4349.68 1010.66,4346.42 1010.66,4132.44 1090.75,4052.36 1092.75,4049.75 1095.08,4047.42 1103.09,4036.97 1105.86,4032.18 1109.65,4025.62 1114.69,4013.46 1118.08,4000.79 1119.8,3987.74 1119.8,3974.62 1118.08,3961.57 1114.69,3948.91 1109.65,3936.74 1107.25,3932.59 1103.09,3925.39 1095.08,3914.94 1085.81,3905.67 1075.36,3897.66 1070.56,3894.89 1064,3891.1 1051.84,3886.06 1039.18,3882.67 1026.12,3880.95 1013.01,3880.95 999.96,3882.67 987.29,3886.06 975.13,3891.1 970.97,3893.5 963.77,3897.66 953.33,3905.67 951,3908 948.39,3910 838.82,4019.57 836.82,4022.18 834.49,4024.51 826.48,4034.95 825.31,4036.97 823.7,4039.75 819.92,4046.31 814.88,4058.47 811.49,4071.14 809.77,4084.19 809.77,4087.48 809.34,4090.75 809.34,4346.42 809.77,4349.68 809.77,4352.97 811.49,4366.03 814.88,4378.69 819.92,4390.85 819.92,4390.86 822.32,4395.01 826.48,4402.21 829.85,4406.61 829.85,4426.34 831.56,4439.34 836.58,4451.45 844.56,4461.86 854.96,4469.84 867.08,4474.86 880.08,4476.57 939.92,4476.57

## Silkscreen, mask and mechanical layers (free items; w line width, h text height)
Top Overlay:
  text "LoraSMS Rev 00" at 1193,4337 h120
  text "5V" at 892,1241 h60
  text "3.3V" at 1475,1232 h60
  text "ON---OFF" at 3036,864 h60 r90
  text "a" at 747,123 h120
  text "Charging" at 1172,49 h60
Bottom Overlay:
  text "a" at 2762,206 h120
Outline_Mech3:
  lines w10: 285,-5 285,4485 3115,4485 3115,-5 288,-5 285,-5

## Text inside footprints (layer, text, board x,y; h text height)
P1: Top Overlay "6" at 1715,2225 h50 r90; Top Overlay "5" at 1815,2225 h50 r90; Top Overlay "2" at 1715,1865 h50 r90; Top Overlay "1" at 1815,1885 h50 r90
U5: Top Overlay "18650 Battery Holder" at 2436.04,1438.08 h78.74 r90